# EAGLE board Glorious Gogo-Jaiks (EAGLE 9.7.0)

Size 97 x 73.59 mm. Coordinates in mm from the lower left corner, seen from the top.
Outline: 0,0 97,0 97,73.59 0,73.59 0,0
Copper layers (1*16): Top 0.035mm / dielectric 1.5mm / Bottom 0.035mm
Design rules "default": minimum track width 6mil, minimum drill 0.35mm, track to track 6mil, track to pad 6mil, pad to pad 6mil, via to via 6mil, smd to smd 6mil, copper to edge 40mil, drill to drill 6mil, minimum pad ring 10mil, minimum via ring 8mil, stop-mask expansion 4mil, vias tented up to drill 0mil, thermal gap 10mil

## Footprints (pad centres in the part's own frame; a part is rotated, then mirrored left to right if it is on the bottom)
BATTERY-GENERIC = drill 1.118 pad 3.15 octagon: + 2.54,0; - -2.54,0
CAPPRD254W65D500H1150B = drill 0.85 pad 1.45: 1 -1.27,0; 2 1.27,0
LEDRD254W60D565H860B = drill 0.981 pad 1.581: 1 -1.27,0; 2 1.27,0
RESAD1016W63L850D250B = drill 0.83 pad 1.43: 1 -5.08,0; 2 5.08,0
DIP826W53P254L959H508Q8B = drill 0.786 pad 1.386: 1 -4.13,3.81; 2 -4.13,1.27; 3 -4.13,-1.27; 4 -4.13,-3.81; 5 4.13,-3.81; 6 4.13,-1.27; 7 4.13,1.27; 8 4.13,3.81

## Placement (x,y rotation side)
BAT1  9V  [BATTERY-GENERIC]  8.26,65.33 270 top
C1  1u  [CAPPRD254W65D500H1150B]  72.89,7.82 180 top
D1  RED  [LEDRD254W60D565H860B]  84.32,25.6 180 top
R1  1k  [RESAD1016W63L850D250B]  90.67,28.14 90 top
R2  1k  [RESAD1016W63L850D250B]  60.19,23.06 0 top
R3  10k  [RESAD1016W63L850D250B]  32.25,17.98 0 top
U2  LM555_DIP  [DIP826W53P254L959H508Q8B]  48.76,11.63 90 top

## Library data of the parts
BAT1 C1 R1-R3 = Tinkercad
D1 = Tinkercad; CATEGORY: Opto-Electronic; SUB-CATEGORY: LED; VALUE: LED_RED
U2 = Tinkercad; CATEGORY: IC_Clock-Timing; CURRENT-SUPPLY: 10mA; DESCRIPTION: IC OSC SINGLE TIMER 100KHZ 8-DIP; FREQUENCY: 100kHz; MANUFACTURER: Texas Instruments; MPN: LM555CN/NOPB; OPERATING_TEMP: 0°C to 70°C; PART_STATUS: Active; ROHS_COMPLIANT: ROHS3 Compliant; SUB-CATEGORY: Timer

## Nets
BAT1+: BAT1.+ R1.2 R3.1 U2.4 U2.8
BAT1-: BAT1.- C1.2 U2.1
D1_A: D1.1 R1.1
U2_DIS: R2.1 R3.2 U2.7
U2_OUT: D1.2 U2.3
U2_TR: C1.1 R2.2 U2.2 U2.6

## Tracks (layer width: path | path; a pad name or v marks a point on that pad's centre or on a via)
BAT1+  (4 unrouted)
BAT1-  (2 unrouted)
D1_A  (1 unrouted)
U2_DIS  (2 unrouted)
U2_OUT  (1 unrouted)
U2_TR  (3 unrouted)